# Allegro board BOOM-LCD_01v1.brd
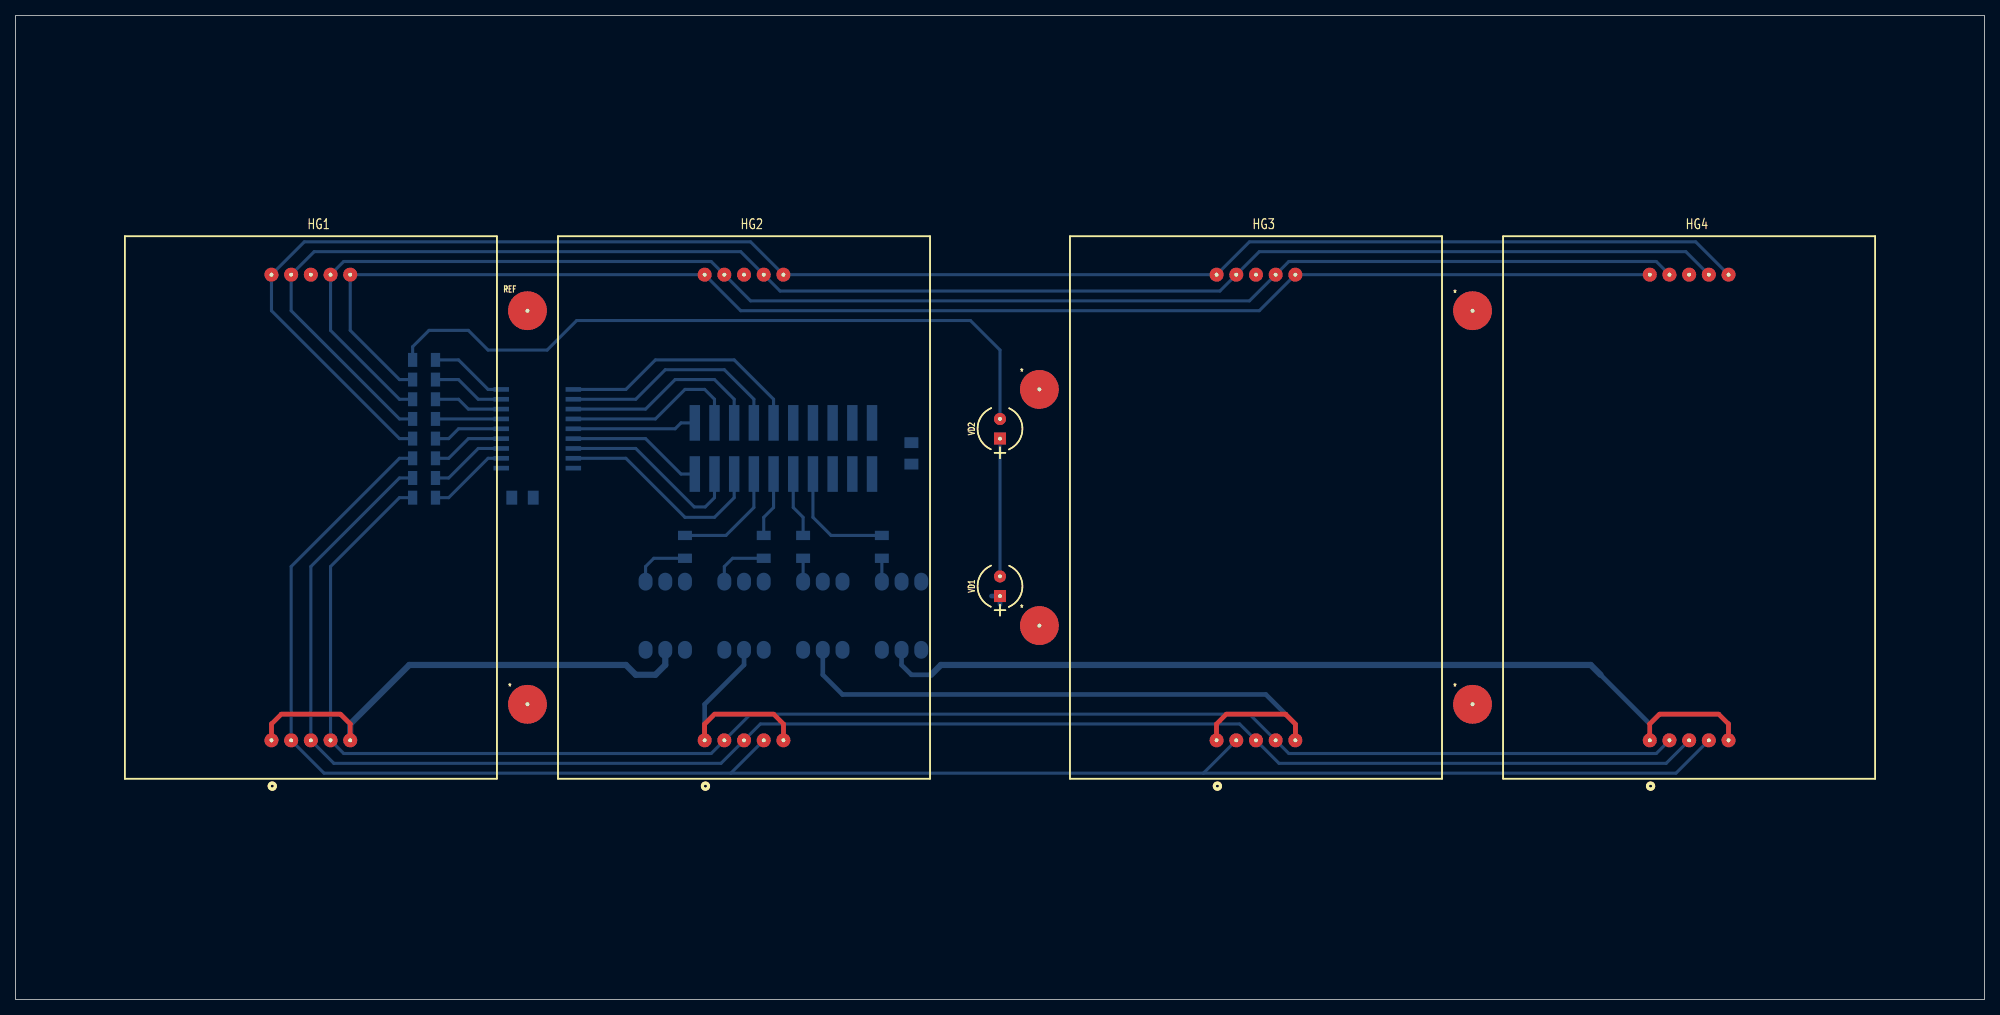
[diagram p0: board, top side]
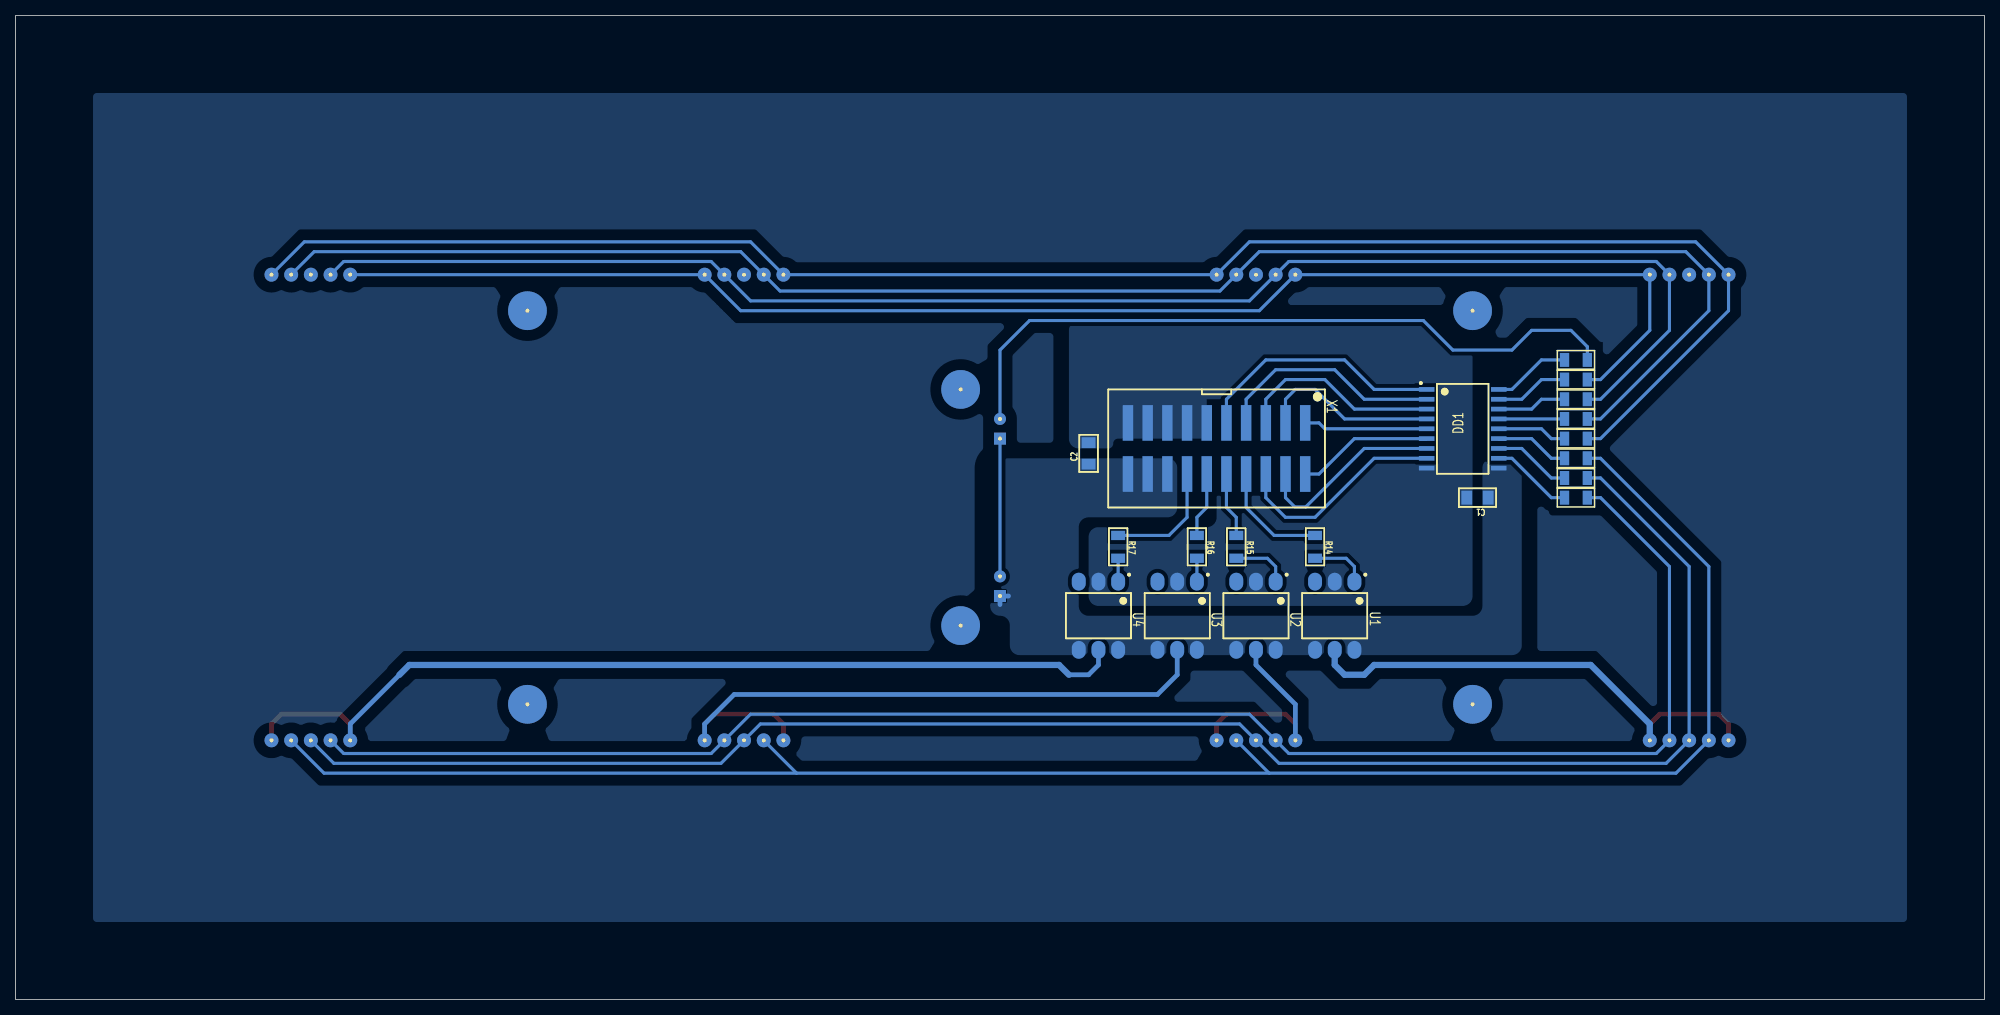
[diagram p1: board, bottom side, seen from below]

Outline 254 x 127 mm; copper layers: TOP, BOTTOM. Coordinates in mm from the lower left corner of the outline.
Outline path: rectangle 0,0 254,127

## Placement (name value [footprint] x y rotation side)
C1  0.1uF  [CAPC3216X110N]  65.41 64.77 0 bottom
C2  10uF  [CAPC3216X110N]  115.57 70.48 90 bottom
DD1  ULN2803A  [SOIC127P1030X265-18N]  67.31 73.66 180 bottom
HG1  SA23-11SRWA  [DIP254P6010X1200-10N]  38.1 63.5 0 top
HG2  SA23-11SRWA  [DIP254P6010X1200-10N]  93.98 63.5 0 top
HG3  SA23-11SRWA  [DIP254P6010X1200-10N]  160.02 63.5 0 top
HG4  SA23-11SRWA  [DIP254P6010X1200-10N]  215.9 63.5 0 top
NOREF  VAL  [unnamed]  66.04 38.1 0 top
NOREF#2  VAL  [unnamed]  66.04 88.9 0 top
NOREF#3  VAL  [unnamed]  187.96 38.1 0 top
NOREF#4  VAL  [unnamed]  187.96 88.9 0 top
R6  1k  [RESC3216X50N]  52.7 82.55 180 bottom
R7  200  [RESC3216X50N]  52.7 80.01 180 bottom
R8  200  [RESC3216X50N]  52.7 77.47 180 bottom
R9  200  [RESC3216X50N]  52.7 74.93 180 bottom
R10  200  [RESC3216X50N]  52.7 72.39 180 bottom
R11  200  [RESC3216X50N]  52.7 69.85 180 bottom
R12  200  [RESC3216X50N]  52.7 67.31 180 bottom
R13  200  [RESC3216X50N]  52.7 64.77 180 bottom
R14  510  [RESC3216X50N]  86.36 58.42 270 bottom
R15  510  [RESC3216X50N]  96.52 58.42 270 bottom
R16  510  [RESC3216X50N]  101.6 58.42 270 bottom
R17  510  [RESC3216X50N]  111.76 58.42 270 bottom
U1  G3VM-351E  [SOIC254P978X342-6M]  83.82 49.53 270 bottom
U2  G3VM-351E  [SOIC254P978X342-6M]  93.98 49.53 270 bottom
U3  G3VM-351E  [SOIC254P978X342-6M]  104.14 49.53 270 bottom
U4  G3VM-351E  [SOIC254P978X342-6M]  114.3 49.53 270 bottom
UNK*  VAL  [unnamed]  132.08 78.74 0 top
UNK*#2  VAL  [unnamed]  132.08 48.26 0 top
VD1  FYL-5013PURD1C-60  [LEDRR254W50L580T580H870N]  127 53.34 90 top
VD2  FYL-5013PURD1C-60  [LEDRR254W50L580T580H870N]  127 73.66 90 top
X1  IDC-20SMD  [SOIC254P1000X1020-20N]  99.06 71.12 270 bottom

## Library data of the parts
C1 C2 = CAPACITOR
DD1 = ULN2803A
HG1-HG4 = SA23-11SRWA_0
R6-R17 = R_0.25W
U1 U3 U4 = PVT412_0
U2 = PVT412_1
VD1 VD2 = LED
X1 = CONN20_6

## Footprints (pads in the part's own frame, mm; a bottom-side part is the same pattern mirrored in y, then rotated)
CAPC3216X110N
  rect 1.4x1.8 smd: 1(-1.385,0) 2(1.385,0)
DIP254P6010X1200-10N
  round 1.8 hole 0.5: 1(-5.08,-30.05) 2(-2.54,-30.05) 3(0,-30.05) 4(2.54,-30.05) 5(5.08,-30.05) 6(5.08,30.05) 7(2.54,30.05) 8(0,30.05) 9(-2.54,30.05) 10(-5.08,30.05)
LEDRR254W50L580T580H870N
  rect 1.55x1.55 hole 0.5: 1(-1.27,0)
  round 1.55 hole 0.5: 2(1.27,0)
RESC3216X50N
  rect 1.2x1.8 smd: 1(-1.475,0) 2(1.475,0)
SOIC127P1030X265-18N
  rect 2x0.6 smd: 1(-4.65,5.08) 2(-4.65,3.81) 3(-4.65,2.54) 4(-4.65,1.27) 5(-4.65,0) 6(-4.65,-1.27) 7(-4.65,-2.54) 8(-4.65,-3.81) 9(-4.65,-5.08) 10(4.65,-5.08) 11(4.65,-3.81) 12(4.65,-2.54) 13(4.65,-1.27) 14(4.65,0) 15(4.65,1.27) 16(4.65,2.54) 17(4.65,3.81) 18(4.65,5.08)
SOIC254P978X342-6M
  oval 2.3x1.8 smd: 1(-4.4,2.54) 2(-4.4,0) 3(-4.4,-2.54) 4(4.4,-2.54) 5(4.4,0) 6(4.4,2.54)
SOIC254P1000X1020-20N
  rect 4.6x1.35 smd: 1(-3.3,11.43) 2(3.3,11.43) 3(-3.3,8.89) 4(3.3,8.89) 5(-3.3,6.35) 6(3.3,6.35) 7(-3.3,3.81) 8(3.3,3.81) 9(-3.3,1.27) 10(3.3,1.27) 11(-3.3,-1.27) 12(3.3,-1.27) 13(-3.3,-3.81) 14(3.3,-3.81) 15(-3.3,-6.35) 16(3.3,-6.35) 17(-3.3,-8.89) 18(3.3,-8.89) 19(-3.3,-11.43) 20(3.3,-11.43)
unnamed
  round 5 hole 0.5: 1(0,0)

## Nets
GND: C1.2 C2.2 DD1.9(GND) U1.2(CATHODE) U2.2(CATHODE) U3.2(CATHODE) U4.2(CATHODE) X1.11(GND#11) X1.13(GND#13) X1.15(GND#15) X1.17(GND#17) X1.19(GND#19)
+12B: C1.1 C2.1 DD1.10(COM) U1.4(DRAIN1) U1.6(DRAIN2) U2.4(DRAIN1) U2.6(DRAIN2) U3.4(DRAIN1) U3.6(DRAIN2) U4.4(DRAIN1) U4.6(DRAIN2) VD1.1(ANODE) X1.16(+12B#16) X1.18(+12B#18) X1.20(+12B#20)
A: HG1.7(A) HG2.9(F) HG3.7(A) HG4.9(F) R8.2
B: HG1.6(B) HG2.10(G) HG3.6(B) HG4.10(G) R7.2
C: HG1.4(C) HG2.2(E) HG3.4(C) HG4.2(E) R13.2
D: HG1.3(D) HG2.3(D) HG3.3(D) HG4.3(D) R12.2
DIG1: HG1.1(DIG#1) HG1.5(DIG#5) U1.5(SOURCE)
DIG2: HG2.1(DIG#1) HG2.5(DIG#5) U2.5(SOURCE)
DIG3: HG3.1(DIG#1) HG3.5(DIG#5) U3.5(SOURCE)
DIG4: HG4.1(DIG#1) HG4.5(DIG#5) U4.5(SOURCE)
DP: R6.2 VD2.2(CATHODE)
E: HG1.2(E) HG2.4(C) HG3.2(E) HG4.4(C) R11.2
F: HG1.9(F) HG2.7(A) HG3.9(F) HG4.7(A) R9.2
G: HG1.10(G) HG2.6(B) HG3.10(G) HG4.6(B) R10.2
N402079: DD1.1(1B) X1.9(DP)
N402085: DD1.2(2B) X1.7(B)
N402091: DD1.3(3B) X1.5(A)
N402097: DD1.4(4B) X1.3(F)
N402103: DD1.5(5B) X1.1(G)
N402109: DD1.6(6B) X1.2(E)
N402115: DD1.7(7B) X1.4(D)
N402121: DD1.8(8B) X1.6(C)
N418493: DD1.18(1C) R6.1
N418497: DD1.17(2C) R7.1
N418509: DD1.16(3C) R8.1
N418521: DD1.15(4C) R9.1
N418533: DD1.14(5C) R10.1
N418545: DD1.13(6C) R11.1
N418557: DD1.12(7C) R12.1
N418569: DD1.11(8C) R13.1
N420424: R14.1 X1.8(DIG1)
N420456: R15.1 X1.10(DIG2)
N420488: R16.1 X1.12(DIG3)
N420520: R17.1 X1.14(DIG4)
N421237: R14.2 U1.1(ANODE)
N424670: VD1.2(CATHODE) VD2.1(ANODE)
N434750: R15.2 U2.1(ANODE)
N435092: R16.2 U3.1(ANODE)
N435429: R17.2 U4.1(ANODE)

Pads without a net: HG1 8; HG2 8; HG3 8; HG4 8; NOREF 1; NOREF#2 1; NOREF#3 1; NOREF#4 1; U1 3; U2 3; U3 3; U4 3; UNK* 1; UNK*#2 1

## Routing (per net, layer and track width the routed paths; a pad name or vN(x,y) marks a point on that pad's centre or on a via; arc(x,y) is an arc through that point)
+12B: length 2.2
  BOTTOM w0.6: 125.9,52.07 VD1.1 127,50.97
A: length 199.8
  BOTTOM w0.4: R8.2 49.53,77.47 40.64,86.36 HG1.7 42.34,95.25 89.74,95.25 HG2.9 94.82,90.17 159.18,90.17 HG3.7 164.26,95.25 211.66,95.25 HG4.9
B: length 189.4
  BOTTOM w0.4: R7.2 49.53,80.01 43.18,86.36 HG1.6 HG2.10 93.55,88.9 160.45,88.9 HG3.6 HG4.10
C: length 215
  BOTTOM w0.4: HG4.2 211.66,31.75 164.26,31.75 HG3.4 159.18,36.83 94.82,36.83 HG2.2 89.74,31.75 42.34,31.75 HG1.4 40.64,55.88 49.53,64.77 R13.2
D: length 224.8
  BOTTOM w0.4: R12.2 49.53,67.31 38.1,55.88 HG1.3 41.07,30.48 91.01,30.48 HG2.3 96.09,35.56 157.91,35.56 HG3.3 162.99,30.48 212.93,30.48 HG4.3
DIG1: length 64.3
  TOP w0.6: HG1.1 33.02,35.56 34.29,36.83 41.91,36.83 43.18,35.56 HG1.5
  BOTTOM w0.8: U1.5 83.82,43.18 82.55,41.91 80.01,41.91 78.74,43.18 50.8,43.18 43.18,35.56 HG1.5
DIG2: length 29.2
  TOP w0.6: HG2.5 99.06,35.56 97.79,36.83 90.17,36.83 88.9,35.56 HG2.1
  BOTTOM w0.6: U2.5 93.98,43.18 88.9,38.1 HG2.1
DIG3: length 84.4
  TOP w0.6: HG3.1 154.94,35.56 156.21,36.83 163.83,36.83 165.1,35.56 HG3.5
  BOTTOM w0.6: HG3.5 165.1,35.56 161.29,39.37 106.68,39.37 104.14,41.91 U3.5
DIG4: length 120.2
  TOP w0.6: HG4.1 210.82,35.56 212.09,36.83 219.71,36.83 220.98,35.56 HG4.5
  BOTTOM w0.6: 118.11,41.91 115.57,41.91 114.3,43.18 U4.5 ; 204.47,41.91 210.82,35.56 HG4.1
  BOTTOM w0.8: 118.11,41.91 119.38,43.18 203.2,43.18 204.47,41.91
DP: length 91.4
  BOTTOM w0.4: R6.2 51.23,84.25 53.34,86.36 58.42,86.36 60.96,83.82 68.58,83.82 72.39,87.63 123.19,87.63 127,83.82 VD2.2
E: length 242.3
  BOTTOM w0.4: 92.28,29.21 153.24,29.21 ; 92.28,29.21 39.8,29.21 HG1.2 35.56,55.88 49.53,69.85 R11.2 ; 92.28,29.21 HG2.4 ; 153.24,29.21 HG3.2 ; 153.24,29.21 214.2,29.21 HG4.4
F: length 215.7
  BOTTOM w0.4: R9.2 49.53,74.93 35.56,88.9 HG1.9 38.53,96.52 93.55,96.52 HG2.7 98.63,91.44 155.37,91.44 HG3.9 160.45,96.52 215.47,96.52 HG4.7
G: length 224.7
  BOTTOM w0.4: HG4.6 216.74,97.79 159.18,97.79 HG3.10 HG2.6 94.82,97.79 37.26,97.79 HG1.10 33.02,88.9 49.53,72.39 R10.2
N402079: length 32.6
  BOTTOM w0.4: DD1.1 78.74,78.74 82.55,82.55 92.71,82.55 97.79,77.47 X1.9
N402085: length 29.5
  BOTTOM w0.4: X1.7 95.25,77.47 91.44,81.28 83.82,81.28 80.01,77.47 DD1.2
N402091: length 26.4
  BOTTOM w0.4: X1.5 92.71,77.47 90.17,80.01 85.09,80.01 81.28,76.2 DD1.3
N402097: length 23.4
  BOTTOM w0.4: DD1.4 82.55,74.93 86.36,78.74 88.9,78.74 90.17,77.47 X1.3
N402103: length 16
  BOTTOM w0.4: DD1.5 85.09,73.66 85.85,74.42 X1.1
N402109: length 17.6
  BOTTOM w0.4: X1.2 85.85,67.82 81.28,72.39 DD1.6
N402115: length 24.9
  BOTTOM w0.4: X1.4 90.17,64.77 88.97,63.57 87.56,63.57 80.01,71.12 DD1.7
N402121: length 28
  BOTTOM w0.4: DD1.8 78.74,69.85 86.36,62.23 90.17,62.23 92.71,64.77 X1.6
N418493: length 10.1
  BOTTOM w0.4: DD1.18 60.96,78.74 57.15,82.55 R6.1
N418497: length 9.5
  BOTTOM w0.4: DD1.17 59.69,77.47 57.15,80.01 R7.1
N418509: length 9
  BOTTOM w0.4: DD1.16 58.42,76.2 57.15,77.47 R8.1
N418521: length 8.5
  BOTTOM w0.4: DD1.15 R9.1
N418533: length 9
  BOTTOM w0.4: DD1.14 57.15,73.66 55.88,72.39 R10.1
N418545: length 9.5
  BOTTOM w0.4: DD1.13 58.42,72.39 55.88,69.85 R11.1
N418557: length 10.1
  BOTTOM w0.4: DD1.12 59.69,71.12 55.88,67.31 R12.1
N418569: length 10.6
  BOTTOM w0.4: R13.1 55.88,64.77 60.96,69.85 DD1.11
N420424: length 14.7
  BOTTOM w0.4: R14.1 91.65,59.9 95.25,63.5 X1.8
N420456: length 8.5
  BOTTOM w0.4: X1.10 97.79,63.5 96.52,62.23 R15.1
N420488: length 8.5
  BOTTOM w0.4: X1.12 100.33,63.5 101.6,62.23 R16.1
N420520: length 15.4
  BOTTOM w0.4: X1.14 102.87,62.23 105.2,59.9 R17.1
N421237: length 7.5
  BOTTOM w0.4: U1.1 81.28,55.88 82.34,56.95 R14.2
N424670: length 17.8
  BOTTOM w0.4: VD2.1 VD1.2
N434750: length 7.5
  BOTTOM w0.4: U2.1 91.44,55.88 92.5,56.95 R15.2
N435092: length 3
  BOTTOM w0.4: R16.2 U3.1
N435429: length 3
  BOTTOM w0.4: R17.2 U4.1

## Copper pours and planes (outline as drawn; the poured copper is in the pictures)
GND on BOTTOM: 118.11,72.39 117.74,71.49 116.84,71.12 113.03,71.12 112.58,71.31 112.21,72.2 111.76,72.39 100.33,72.39 99.43,72.02 99.06,71.12 99.06,62.23 99.43,61.33 100.33,60.96 114.3,60.96 115.2,60.59 115.57,59.69 115.57,52.07 115.2,51.17 114.3,50.8 67.31,50.8 66.41,51.17 66.04,52.07 66.04,86.36 66.41,87.26 67.31,87.63 116.84,87.63 117.74,87.26 118.11,86.36 ; 1 cut-out
+12B on BOTTOM: 59.69,69.85 63.5,69.85 64.4,69.48 64.77,68.58 64.77,50.8 65.14,49.9 66.04,49.53 115.57,49.53 116.47,49.9 116.84,50.8 116.84,60.96 116.47,61.86 115.57,62.23 105.41,62.23 104.51,62.6 104.14,63.5 104.14,68.58 104.51,69.48 105.41,69.85 127,69.85 127.9,69.48 128.27,68.58 128.27,50.8 127.9,49.9 126.1,49.16 125.73,48.26 125.73,45.72 125.36,44.82 124.46,44.45 60.96,44.45 60.06,44.82 59.69,45.72
Net_7 on BOTTOM: 10,10 10,117 244,117 244,10
